# EAGLE board pyacqua (EAGLE 4.16)

Size 101.27 x 83.81 mm. Coordinates in mm from the lower left corner, seen from the top.
Outline: 0,0 101.27,3.81 101.27,83.81 1.27,83.81 0,0
Copper layers (1*16): Top 0.035mm / dielectric 1.5mm / Bottom 0.035mm
Design rules "default": minimum track width 10mil, minimum drill 24mil, track to track 8mil, track to pad 8mil, pad to pad 8mil, via to via 8mil, smd to smd 8mil, copper to edge 40mil, drill to drill 8mil, minimum pad ring 10mil, minimum via ring 8mil, stop-mask expansion 4mil, vias tented up to drill 0mil, thermal gap 10mil

## Footprints (pad centres in the part's own frame; a part is rotated, then mirrored left to right if it is on the bottom)
DIL16 = drill 0.813 long: 1 -8.89,-3.81; 2 -6.35,-3.81; 3 -3.81,-3.81; 4 -1.27,-3.81; 5 1.27,-3.81; 6 3.81,-3.81; 7 6.35,-3.81; 8 8.89,-3.81; 9 8.89,3.81; 10 6.35,3.81; 11 3.81,3.81; 12 1.27,3.81; 13 -1.27,3.81; 14 -3.81,3.81; 15 -6.35,3.81; 16 -8.89,3.81
REED = drill 0.813 long: 1 -17.78,2.54; 3 -12.7,2.54; 5 -7.62,2.54; 7 -2.54,2.54
SOT54A = drill 0.813 octagon: B 0,1.905; C -1.27,0; E 1.27,0
KH206-8 = drill 1.016 pad 2.54 octagon: 1 -13.335,0; 2 13.335,0

## Placement (x,y rotation side)
IC1  PCF8574P  [DIL16]  38.57,50.16 0 top
K1  35701331  [REED]  85.56,6.98 0 top
Q2  BC337  [SOT54A]  48.73,9.52 0 top
R1  [KH206-8]  53.81,36.19 0 top
R2  [KH206-8]  27.14,69.21 0 top

## Library data of the parts
IC1 = micro-philips
K1 = relay
Q2 = transistor-small-signal
R1 R2 = resistor-power

## Nets
N$1: Q2.B R1.2
N$2: IC1.15 R2.2
N$3: IC1.4 R1.1
N$4: K1.3
N$5: IC1.1 IC1.2 IC1.3 Q2.C
N$6: IC1.8
N$10: K1.5 Q2.E
N$13: IC1.16 R2.1
N$14: IC1.14

## Tracks (layer width: path | path; a pad name or v marks a point on that pad's centre or on a via)
N$1  (1 unrouted)
N$2  (1 unrouted)
N$3  (1 unrouted)
N$5  (3 unrouted)
N$10  (1 unrouted)
N$13  (1 unrouted)